# EAGLE board SparkFun_6DoF_ISM330DHCX_Qwiic_Micro (EAGLE 9.6.2)
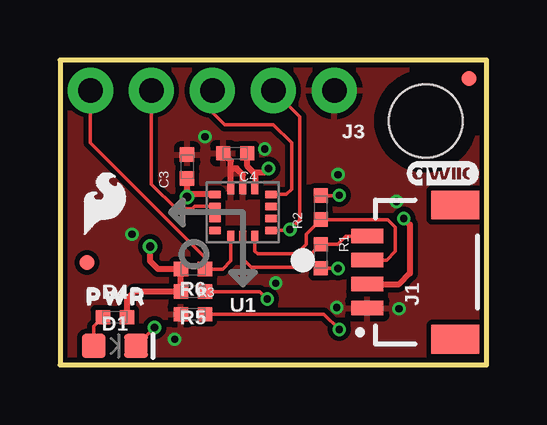
[diagram p0: board, top side]
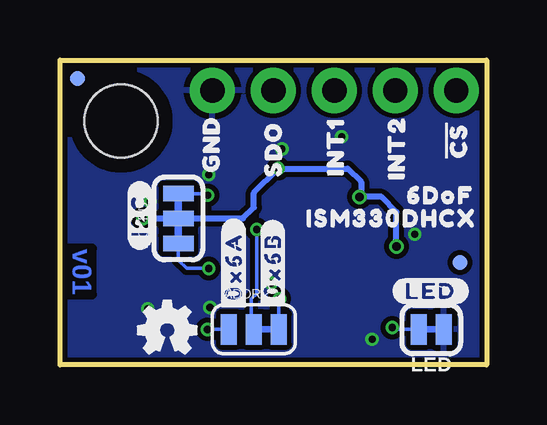
[diagram p1: board, bottom side, seen from below]

Size 17.78 x 12.7 mm. Coordinates in mm from the lower left corner, seen from the top.
Outline: 17.78,12.7 0,12.7 0,0 17.78,0 17.78,12.7
Copper layers (1*16): Top 0.035mm / dielectric 1.5mm / Bottom 0.035mm
Design rules "SparkFun-2-Layer-Minimum-JLCPCB": minimum track width 5mil, minimum drill 0.3mm, track to track 5mil, track to pad 5mil, pad to pad 5mil, via to via 5mil, smd to smd 5mil, copper to edge 7mil, drill to drill 7mil, minimum pad ring 5mil, minimum via ring 5mil, stop-mask expansion 2.5mil, vias tented up to drill 25mil, thermal gap 10mil
tRestrict: area 7.4,7.3 to 7.4,7.4

## Footprints (pad centres in the part's own frame; a part is rotated, then mirrored left to right if it is on the bottom)
SMT-JUMPER_3_1-NC_TRACE_SILK = smd 0.66 x 1.27: 1 -1.041,0; 2 0,0; 3 1.041,0
0402-TIGHT = smd 0.6 x 0.6: 1 -0.5,0; 2 0.5,0
LED-0603 = smd 1 x 1: A -0.877,0; C 0.877,0
FIDUCIAL-MICRO = smd 0.635 x 0.635: 1 0,0
SMT-JUMPER_3_2-NC_TRACE_SILK = smd 0.66 x 1.27: 1 -1.041,0; 2 0,0; 3 1.041,0
JST04_1MM_RA = smd 0.6 x 1.35: 1 -1.5,0; 2 -0.5,0; 3 0.5,0; 4 1.5,0 | smd 1.2 x 2: NC1 2.8,-3.675; NC2 -2.8,-3.675
1X05_NO_SILK = drill 1.016 pad 1.88: 1 0,0; 2 2.54,0; 3 5.08,0; 4 7.62,0; 5 10.16,0
SMT-JUMPER_2_NC_TRACE_SILK = smd 0.66 x 1.27: 1 -0.521,0; 2 0.521,0
STAND-OFF-TIGHT = hole 3.048: 0,0
LGA-14L = smd 0.48 x 0.3: P1 -1.163,0.75; P2 -1.163,0.25; P3 -1.163,-0.25; P4 -1.163,-0.75; P8 1.163,-0.75; P9 1.163,-0.25; P10 1.163,0.25; P11 1.163,0.75 | smd 0.3 x 0.48: P5 -0.5,-1; P6 0,-1; P7 0.5,-1; P12 0.5,1; P13 0,1; P14 -0.5,1

## Placement (x,y rotation side)
ADDR  JUMPER-SMT_3_1-NC_TRACE_SILK  [SMT-JUMPER_3_1-NC_TRACE_SILK]  9.7,1.48 0 bottom
C3  0.1uF  [0402-TIGHT]  5.3,8.26 90 top
C4  0.1uF  [0402-TIGHT]  7.3,8.81 180 top
D1  RED  [LED-0603]  2.29,0.79 0 top
FD1  FIDUCIALUFIDUCIAL  [FIDUCIAL-MICRO]  17.04,11.94 0 bottom
FD2  FIDUCIALUFIDUCIAL  [FIDUCIAL-MICRO]  1.12,4.27 0 bottom
FID1  FIDUCIALUFIDUCIAL  [FIDUCIAL-MICRO]  17.04,11.94 0 top
FID2  FIDUCIALUFIDUCIAL  [FIDUCIAL-MICRO]  1.12,4.27 0 top
FRAME1  FRAME-LETTER  [CREATIVE_COMMONS]  -19.05,-11.43 0 top  (outside the outline)
I2C_PU  S_MODE  [SMT-JUMPER_3_2-NC_TRACE_SILK]  12.85,6.1 90 bottom
J1  Qwiic Right Angle  [JST04_1MM_RA]  12.8,3.86 90 top
J3  [1X05_NO_SILK]  11.43,11.43 180 top
LED  JUMPER-SMT_2_NC_TRACE_SILK  [SMT-JUMPER_2_NC_TRACE_SILK]  2.31,1.47 180 bottom
LOGO1  QWIIC_LOGO_3MM  [QWIIC_3MM]  15.95,7.98 0 top
LOGO2  OSHW-LOGOMINI  [OSHW-LOGO-MINI]  13.31,1.45 0 bottom
LOGO3  SFE_LOGO_NAME_FLAMEBLANK  [BLANK]  -39.37,-15.24 0 top  (outside the outline)
R1  2.2k  [0402-TIGHT]  10.86,4.52 270 top
R2  2.2k  [0402-TIGHT]  10.86,6.55 90 top
R3  10k  [0402-TIGHT]  5.55,3.99 180 top
R4  1k  [0402-TIGHT]  2.29,1.98 0 top
R5  10k  [0402-TIGHT]  5.54,3.05 180 top
R6  10k  [0402-TIGHT]  5.54,2.11 0 top
STANDOFF1  STAND-OFFTIGHT  [STAND-OFF-TIGHT]  15.24,10.16 0 top
U1  ISM330DHCX  [LGA-14L]  7.62,6.35 180 top
U$1  [ISM330DHCX2115]  3.96,6.1 0 bottom
U$2  [6DOF2115]  1.93,7.06 0 bottom
U$13  [#0X6A#11]  10.54,4.11 90 bottom
U$14  [#0X6B#11]  8.92,4.14 90 bottom
U$16  [#LED#11]  2.34,3.07 0 bottom
U$25  [#I2C#11]  14.45,6.22 90 bottom
U$28  [PWR8]  2.34,2.84 0 top
U$29  [SFE_LOGO_FLAME_.1]  1.85,6.73 0 top
U$38  [#CS#2114]  1.27,9.35 90 bottom
U$39  [SDO2113]  8.89,8.99 90 bottom
U$42  [GND4]  11.48,9.19 90 bottom
U$44  [INT110]  6.3,9.09 90 bottom
U$45  [INT2111]  3.76,9.04 90 bottom

## Library data of the parts
ADDR I2C_PU LED = SparkFun-Jumpers
C3 C4 = SparkFun-Capacitors; PROD_ID: CAP-14993
D1 = SparkFun-LED; PROD_ID: DIO-00819
FD1 FD2 FID1 FID2 LOGO1-LOGO3 U$29 = SparkFun-Aesthetics
FRAME1 = SparkFun-Aesthetics; DESIGNER: Elias Santistevan
J1 = SparkFun-Connectors; PROD_ID: CONN-13694
J3 = SparkFun-Connectors
R1 R2 = SparkFun-Resistors; PROD_ID: RES-14341
R3 R5 R6 = SparkFun-Resistors; PROD_ID: RES-14241
R4 = SparkFun-Resistors; PROD_ID: RES-14342
STANDOFF1 = SparkFun-Hardware
U1 = ISM330DHCX; PROD_ID: SEN-19472
U$1 U$2 U$38 U$39 U$42 U$44 U$45 = ISMTopMini
U$13 U$14 U$16 U$25 = bot
U$28 = top

## Nets
3.3V: C3.1 C4.1 I2C_PU.2 J1.2 R3.2 R4.2 R5.2 U1.P5 U1.P8
!CS!: J3.5 R3.1 U1.P12
GND: C3.2 C4.2 J1.1 J3.1 LED.1 R6.1 U1.P6 U1.P7
INT1: J3.3 U1.P4
INT2: J3.4 U1.P9
N$1: ADDR.3 R5.1
N$2: D1.A R4.1
N$3: D1.C LED.2
N$5: I2C_PU.1 R1.2
N$6: I2C_PU.3 R2.2
N$7: ADDR.1 R6.2
POCI/SA0: ADDR.2 J3.2 U1.P1
SCL: J1.4 R1.1 U1.P13
SDA/PICO: J1.3 R2.1 U1.P14

## Tracks (layer width: path | path; a pad name or v marks a point on that pad's centre or on a via)
3.3V  (via drill 0.3, 0.35)
  Top 0.254: J1.2 14.13,3.36 14.58,3.81 14.58,5.84 v14.33,6.1 | U1.P5 8.13,7.95 8.06,8.01 | C4.1 7.8,8.27 8.06,8.01 | U1.P8 5.4,7.1 v5.3,7 C3.1 | v3.76,4.93 3.76,4.32 4.09,3.99 R3.2 5.04,3.98 R5.2 3.1,3.05 2.79,2.73 R4.2 | v8.69,8.18 8.52,8.01 8.06,8.01
  Bottom 0.254: v3.76,4.93 3.76,6.38 4.38,7 5.23,7 | 5.23,7 v5.3,7 | v14.33,6.1 I2C_PU.2 10.16,6.1 9.7,6.55 9.7,7.16 v8.69,8.18 5.79,8.18 5.23,7.62 5.23,7
!CS!
  Top 0.152: U1.P12 7.12,4.33 6.78,3.99 R3.1 6.05,4.47 1.27,9.25 J3.5
GND  (via drill 0.3)
  Top 0.254: U1.P7 7.12,8.18 | 7.12,8.18 7.12,8.5 C4.2 | U1.P6 7.62,7.92 7.36,8.18 7.12,8.18
  other vias: 6.05,9.5 14.02,6.81 3,5.44 8.99,3.4 11.53,2.39 14.12,2.34 8.53,8.99 4.78,1.07 11.58,7.92
  pour Bottom (isolate 0.203): 17.78,0 17.78,12.7 0,12.7 0,0
  pour Top (isolate 0.203, rank 2): 17.78,0 17.78,12.7 0,12.7 0,0
INT1
  Top 0.152: U1.P4 9.44,7.1 9.65,7.32 9.65,9.25 8.89,10.01 6.86,10.01 6.35,10.52 J3.3
INT2
  Top 0.152: U1.P9 5.61,6.6 5.5,6.49 4.84,6.49 3.81,7.52 J3.4
N$1  (via drill 0.3)
  Top 0.152: R5.1 8.33,3.05 v8.64,2.74
  Bottom 0.152: v8.64,2.74 8.66,2.72 ADDR.3
N$2
  Top 0.152: D1.A 1.41,1.6 R4.1
N$3  (via drill 0.3)
  Top 0.152: v3.94,1.55 3.93,1.55 D1.C
  Bottom 0.152: 2.88,1.42 LED.2 3.86,1.47 v3.94,1.55
N$5  (via drill 0.3)
  Top 0.152: R1.2 v11.57,4.02 v11.58,4.01
  Bottom 0.152: v11.58,4.01 12.5,4.01 12.85,4.36 I2C_PU.1
N$6  (via drill 0.3)
  Top 0.152: R2.2 v11.62,7.05 v11.63,7.06
  Bottom 0.152: v11.63,7.06 11.71,7.14 I2C_PU.3
N$7  (via drill 0.3)
  Top 0.152: R6.2 11,2.11 v11.63,1.47
  Bottom 0.152: v11.63,1.47 ADDR.1
POCI/SA0  (via drill 0.3)
  Top 0.152: U1.P1 9.54,5.6 v9.58,5.64 9.98,6.04 9.98,10.34 J3.2
  Bottom 0.152: v9.58,5.64 9.58,2.97 9.8,2.74 9.8,1.58 ADDR.2
SCL
  Top 0.152: J1.4 11.91,5.36 11.57,5.02 R1.1 9.91,4.06 7.98,4.06 7.62,4.42 U1.P13
SDA/PICO
  Top 0.152: J1.3 13.61,4.36 13.97,4.72 13.97,5.74 13.66,6.05 R2.1 10.26,5.45 10.26,5.03 9.86,4.62 8.23,4.62 8.12,4.73 U1.P14

## Text on the board
Bottom: v01
Measures: Units in Inches